# Altium PCB RGBlink.PcbDoc (part 2 of 2)
Units mm, origin at the board's own origin, x right, y up, seen from the top; angles counter-clockwise.
Board outline 49.44 x 43.42 mm, 2 copper layers (Top Layer, Bottom Layer), stack 1.621 mm thick; 48 components, 43 nets, 170 pads, 158 vias.
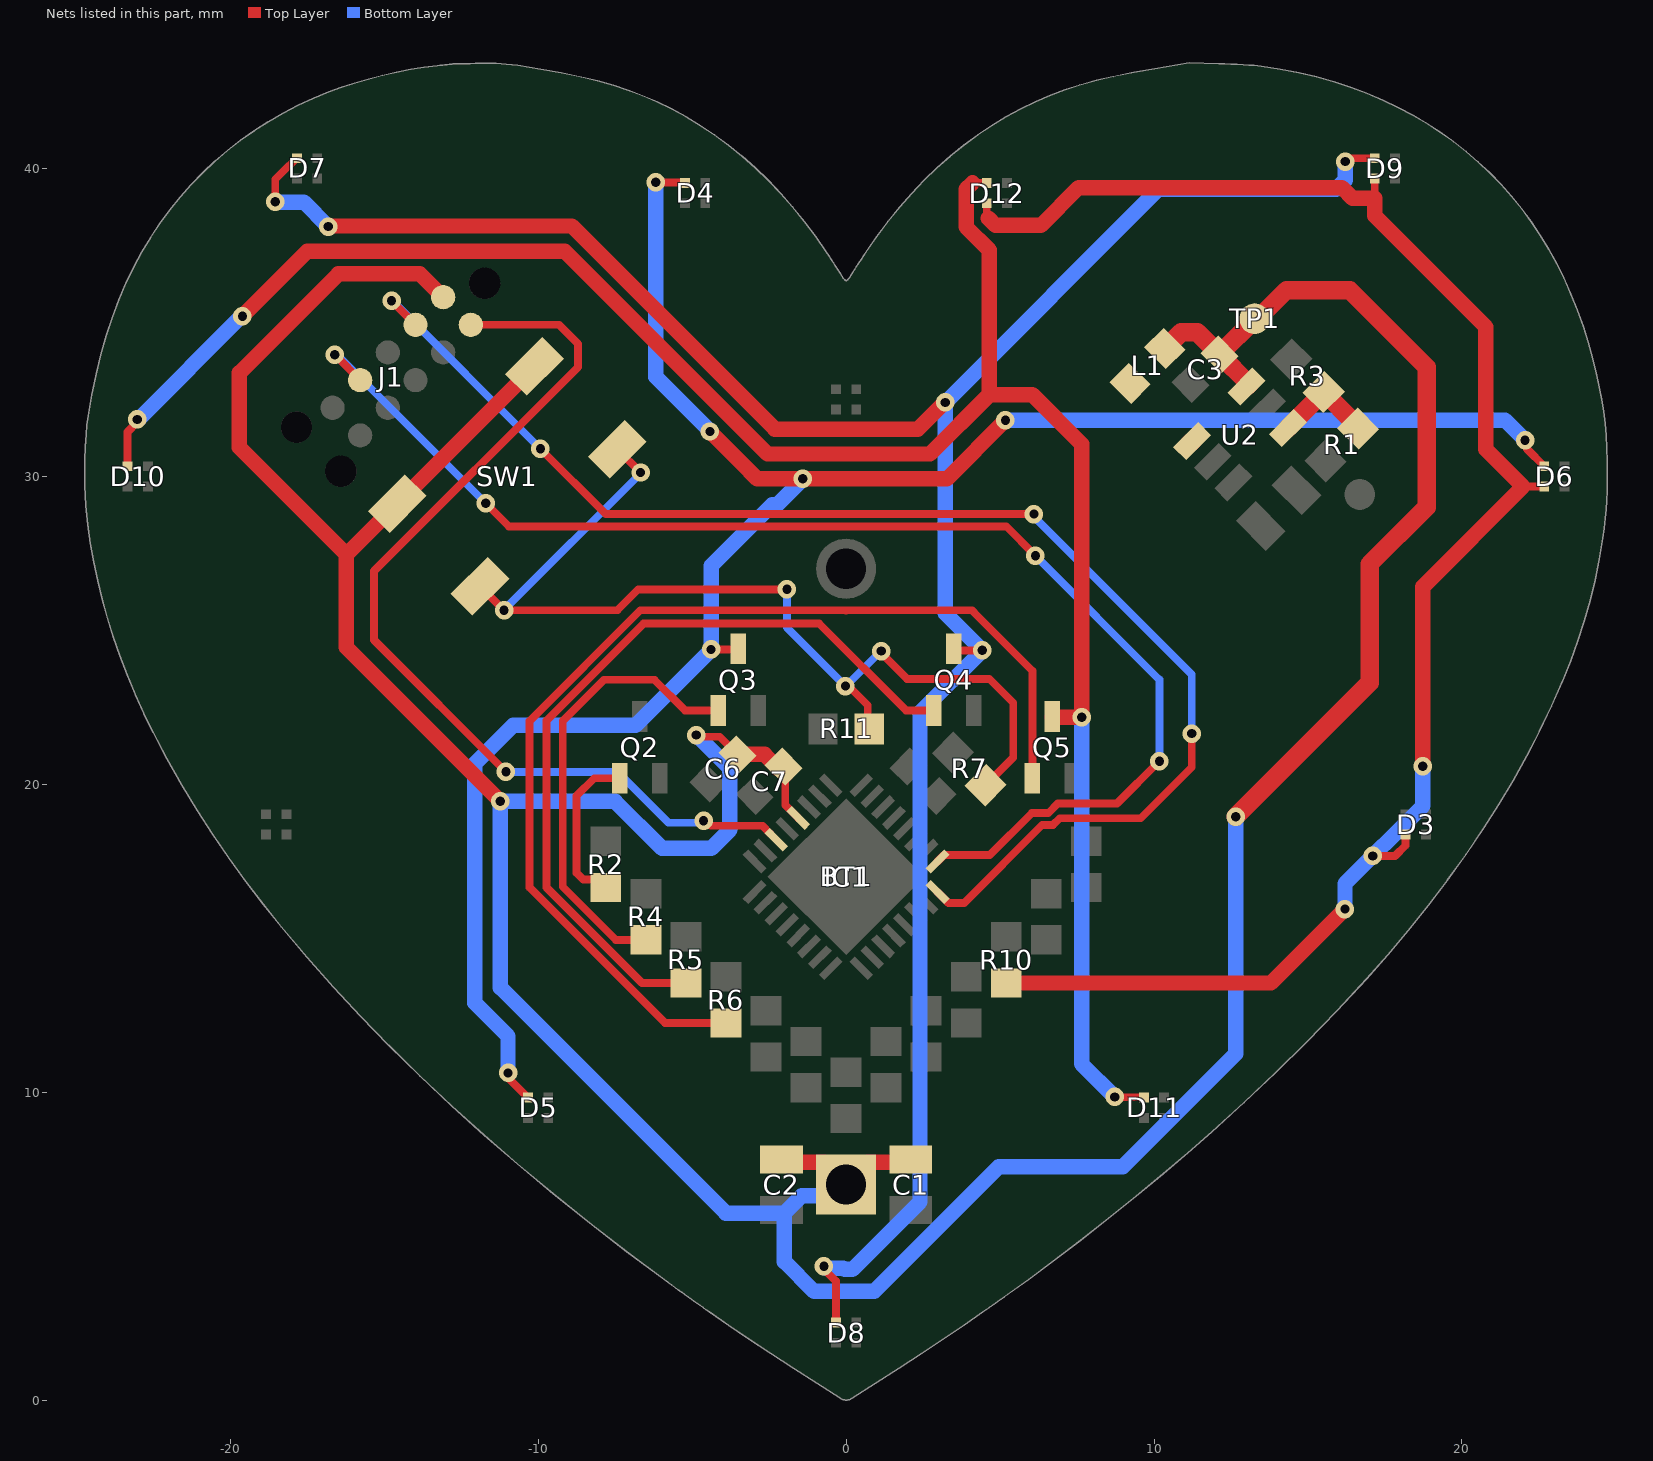
[diagram p2: the nets of this part, all layers, seen from the top]

## Via types
v1: diameter 0.6, hole 0.3, Top Layer to Bottom Layer, tented both sides, 157 vias
v2: diameter 1, hole 0.5, Top Layer to Bottom Layer, tented both sides, 1 vias

## Nets (pads, with @x,y where several pads share a name; then routed paths per layer and width w, separated by ;. In a path a pad name is that pad's centre, name@x,y a point inside that pad or via, vN(x,y) a via of type N, cw(c..) or ccw(c..) an arc to the next point about the centre after c; other vN are vias at no path point) (continued)
NetD3_3: D3.3 D6.3 D9.3 D12.3 R10.2 | length 56.3
  Top Layer w0.254: 4.569,38.381 D12.3@4.569,38.869 ; v1(17.1,17.675) 17.825,17.675 18.169,18.019 D3.3@18.169,18.369 ; 17.169,39.03 D9.3@17.169,39.669 ; 21.819,29.669 21.981,29.669 D6.3@22.669,29.669
  Top Layer w0.5: 4.621,38.381 4.852,38.15 6.325,38.15 7.55,39.375 16.1,39.375 16.445,39.03 17.169,39.03 17.169,38.456 20.775,34.85 20.775,30.875 21.981,29.669 18.727,26.416 v1(18.727,20.589) ; R10.2@5.2,13.55 13.8,13.55 v1(16.2,15.95)
  Bottom Layer w0.5: v1(16.2,15.95) 16.2,16.775 18.727,19.302 v1(18.727,20.589)
NetD4_4: D4.4 D5.4 D6.4 Q3.3 | length 67.5
  Top Layer w0.254: v1(-10.975,10.63) -10.909,10.564 -10.909,10.408 D5.4@-10.331,9.83 ; v1(-6.179,39.547) -6.17,39.538 -5.239,39.538 D4.4@-5.231,39.53 ; v1(-4.381,24.381) -3.519,24.381 Q3.3@-3.5,24.4 ; v1(22.047,31.171) 22.113,31.105 22.113,30.886 D6.4@22.669,30.33
  Top Layer w0.5: v1(-4.419,31.456) -3.416,30.454 -2.883,29.921 3.271,29.921 v1(5.175,31.825)
  Bottom Layer w0.5: v1@-10.975,10.657 -10.975,11.826 -12.05,12.901 -12.05,20.675 -10.812,21.913 -6.837,21.913 -4.381,24.369 v1(-4.381,24.381) ; v1(-6.179,39.547) -6.175,39.543 -6.175,33.225 -4.419,31.469 v1(-4.419,31.456) ; v1@-4.375,24.402 -4.375,27.1 -2.398,29.077 -2.248,29.077 v1(-1.404,29.921) ; v1(5.175,31.825) 21.395,31.825 22.047,31.173 v1(22.047,31.171)
NetD7_4: D7.4 D8.4 D9.4 Q4.3 | length 78.5
  Top Layer w0.254: v1(-18.533,38.92) -18.533,39.646 -18.096,40.083 -18.077,40.083 D7.4@-17.831,40.33 ; v1(-0.719,4.356) -0.719,4.262 -0.331,3.874 D8.4@-0.331,2.53 ; Q4.3@3.5,24.4 3.55,24.35 v1(4.425,24.35) ; v1@16.41,40.33 17.16,40.33 D9.4@17.165,40.325
  Top Layer w0.5: v1(-16.815,38.109) -16.795,38.128 -8.903,38.128 -2.31,31.535 0.001,31.535 0.011,31.525 2.323,31.525 3.198,32.4 v1(3.225,32.4)
  Bottom Layer w0.5: v1(-18.533,38.92) -18.514,38.901 -17.607,38.901 v1(-16.815,38.109) ; v1(-0.719,4.356) -0.653,4.29 -0.085,4.29 -0.047,4.252 0.207,4.252 2.4,6.445 2.4,22.325 v1(4.425,24.35) 3.225,25.55 v1(3.225,32.4) 10.15,39.325 15.915,39.325 16.208,39.618 v1(16.208,40.221)
NetD10_4: D10.4 D11.4 D12.4 Q5.3 | length 70.1
  Top Layer w0.254: D10.4@-23.331,30.33 -23.331,31.438 -23.012,31.756 v1(-23.012,31.85) ; 4.105,39.53 D12.4@4.569,39.53 ; v1(8.725,9.85) 8.735,9.84 9.659,9.84 D11.4@9.669,9.83
  Top Layer w0.5: v1(-19.6,35.2) -17.495,37.305 -9.13,37.305 -2.55,30.725 2.725,30.725 4.65,32.65 ; 4.105,39.53 3.899,39.324 3.899,38.101 4.65,37.35 4.65,32.65 ; Q5.3@6.7,22.2 6.725,22.175 v1(7.65,22.175) 7.65,31.05 6.05,32.65 4.65,32.65
  Bottom Layer w0.254: v1(-23.012,31.85) v1@-22.979,31.85 ; v1@-19.629,35.2 v1(-19.6,35.2)
  Bottom Layer w0.5: v1@-22.979,31.85 v1@-19.629,35.2 ; v1(7.65,22.175) 7.65,10.925 v1(8.725,9.85)
NetL1_2: L1.2 U2.1 | length 0.1
  Top Layer w0.6: U2.1@11.164,31.074 U2.1@11.234,31.145
NetQ2_1: Q2.1 R2.1 | length 5.3
  Top Layer w0.254: R2.1@-7.8,16.65 -8.057,16.907 -8.532,16.907 -8.75,17.125 -8.75,19.625 -8.175,20.2 Q2.1@-7.35,20.2
NetQ3_1: Q3.1 R4.1 | length 14.8
  Top Layer w0.254: R4.1@-6.5,14.95 -7.475,14.95 -9.2,16.675 -9.2,22.055 -7.857,23.398 -6.223,23.398 -5.225,22.4 Q3.1@-4.15,22.4
NetQ4_1: Q4.1 R5.1 | length 26.3
  Top Layer w0.254: R5.1@-5.2,13.55 -6.623,13.55 -9.725,16.652 -9.725,22.069 -6.575,25.219 -0.869,25.219 1.95,22.4 Q4.1@2.85,22.4
NetQ5_1: Q5.1 R6.1 | length 35.7
  Top Layer w0.254: R6.1@-3.9,12.25 -5.873,12.25 -10.275,16.652 -10.275,22.058 -6.683,25.65 -0.127,25.65 ccw(c0,27) 0.127,25.65 4.088,25.65 4.162,25.576 6.05,23.688 Q5.1@6.05,20.2
NetR1_1: R1.1 R3.2 U2.4 | length 3.3
  Top Layer w0.6: U2.4@14.346,31.569 R3.2@15.512,32.735 16.521,31.727 16.521,31.552 R1.1@16.502,31.533
NetR7_1: R7.1 R11.2 SW1.2 | length 33.4
  Top Layer w0.254: SW1.2@-11.884,26.429 v1(-11.105,25.65) -7.425,25.65 -6.744,26.331 v1(-1.921,26.331) ; SW1.2@-7.429,30.884 v1(-6.67,30.125) ; v1(-0.02,23.189) 0.047,23.123 0.15,23.123 0.706,22.566 0.706,21.844 R11.2@0.75,21.8 ; v1(1.143,24.326) 1.143,24.264 1.982,23.425 4.65,23.425 5.431,22.644 5.431,20.87 R7.1@4.53,19.97
  Bottom Layer w0.254: v1(-11.105,25.65) -11.105,25.67 -6.67,30.105 v1(-6.67,30.125) ; v1(-1.921,26.331) -1.921,25.09 v1(-0.02,23.189) -0.007,23.189 1.13,24.326 v1(1.143,24.326)
NRST: IC1.6 J1.10 | length 31.6
  Top Layer w0.254: J1.10@-12.183,34.921 -9.321,34.921 -8.7,34.3 -8.7,33.55 -15.325,26.925 -15.325,24.687 v1(-11.044,20.406) ; v1(-4.625,18.819) -4.55,18.819 -4.385,18.654 -2.714,18.654 IC1.6@-2.473,18.413
  Bottom Layer w0.254: v1(-11.044,20.406) -11.038,20.4 -7.413,20.4 -5.766,18.753 -4.691,18.753 v1(-4.625,18.819)
SWCLK: IC1.25 J1.4 | length 43.5
  Top Layer w0.254: v1@-16.563,33.913 J1.4@-15.775,33.125 ; v1(-11.7,29.125) -10.95,28.375 5.2,28.375 v1(6.15,27.425) ; IC1.25@2.97,17.495 3.179,17.704 4.668,17.704 6.029,19.065 6.563,19.065 6.873,19.375 8.8,19.375 v1(10.175,20.75)
  Bottom Layer w0.254: v1(-16.6,33.95) -16.525,33.95 v1(-11.7,29.125) ; v1(6.15,27.425) 10.175,23.4 v1(10.175,20.75)
SWDIO: IC1.24 J1.2 | length 45.4
  Top Layer w0.254: v1@-14.741,35.684 J1.2@-13.979,34.921 ; v1(-9.925,30.9) -7.8,28.775 v1(6.1,28.775) ; IC1.24@2.97,16.505 3.325,16.15 3.836,16.15 6.37,18.684 6.721,18.684 6.937,18.9 9.569,18.9 11.225,20.556 v1(11.225,21.65)
  Bottom Layer w0.254: v1(-14.758,35.7) -14.725,35.7 v1(-9.925,30.9) ; v1(6.1,28.775) 6.1,28.694 11.225,23.569 v1(11.225,21.65)
VCC: BT1.1 C1.2 C2.2 C3.2 C6.2 C7.2 IC1.4 J1.1 L1.1 SW1.1 TP1.1 U2.6 | length 134.3
  Top Layer w0.254: v1(-4.865,21.598) -4.814,21.547 -4.1,21.547 C6.2@-3.48,20.928 ; C7.2@-1.826,20.474 -1.826,20.289 -1.98,20.135 -1.975,20.129 -1.975,19.329 IC1.4@-1.556,18.909
  Top Layer w0.5: J1.1@-13.081,35.819 -13.837,36.575 -16.487,36.575 -19.7,33.362 -19.7,30.937 -16.225,27.462 ; v1(-11.225,19.45) -16.225,24.45 -16.225,27.462 ; SW1.1@-10.116,33.571 SW1.1@-14.571,29.116 -16.225,27.462 ; C6.2@-3.526,20.974 -3.307,20.974 -3.261,20.928 -3.215,20.974 -2.645,20.974 -2.145,20.474 C7.2@-1.826,20.474 ; C2.2@-2.1,7.82 -2.005,7.725 -0.725,7.725 BT1.1@0,7 0.725,7.725 2.005,7.725 C1.2@2.1,7.82
  Top Layer w0.6: L1.1@10.351,34.15 10.881,34.68 11.404,34.68 C3.2@12.132,33.952 ; v1(12.65,18.95) 17,23.3 17,27.15 18.85,29 18.85,33.55 16.35,36.05 14.305,36.05 13.376,35.121 TP1.1@13.268,35.121 13.268,35.104 12.132,33.969 C3.2@12.132,33.952 ; U2.6@13.002,32.912 13.087,32.997 C3.2@12.132,33.952
  Bottom Layer w0.5: v1(-4.865,21.598) -4.859,21.598 -3.775,20.514 -3.775,18.525 -4.375,17.925 -5.975,17.925 -7.5,19.45 v1(-11.225,19.45) -11.225,13.4 -3.9,6.075 -2,6.075 ; BT1.1@0,7 -0.357,6.643 -1.432,6.643 -1.754,6.321 -2,6.075 ; v1(12.65,18.95) 12.65,11.248 8.98,7.577 4.952,7.577 0.912,3.537 -1.037,3.537 -2,4.5 -2,6.075
pads on no net: J1.7 J1.9 J1.A J1.B J1.C

## Polygon pours and split planes (outlines as drawn)
GND on Top Layer "GND_L01_P003" (solid, pour order 3): -23.58,24.179 cw(c-4.488,31.162) -24.303,26.619 cw(c-7.002,30.585) -24.685,29.048 cw(c-15.985,29.805) -24.717,29.707 cw(c-2.546,29.954) -24.711,30.542 cw(c-2.741,29.96) -24.674,31.363 cw(c-17.951,30.933) -24.608,31.967 cw(c-3.322,28.66) -24.352,33.326 cw(c-8.547,29.82) -24.023,34.571 cw(c-10.135,30.307) -23.615,35.723 cw(c-11.591,30.892) -23.123,36.804 cw(c-12.294,31.252) -21.957,38.648 cw(c-12.782,31.627) -20.495,40.228 cw(c-12.73,31.568) -18.76,41.515 cw(c-12.261,30.794) -16.785,42.486 cw(c-12.595,31.659) -15.967,42.768 cw(c-11.211,27.097) -15.057,43.016 cw(c-11.206,27.077) -14.133,43.211 cw(c-12.045,31.701) -13.275,43.334 ccw(c-19.728,104.362) -13.105,43.353 ccw(c-17.884,87.389) -12.949,43.37 ccw(c-18.49,92.779) -12.818,43.385 ccw(c-13.001,44.973) -12.768,43.391 cw(c-12.701,42.94) -12.712,43.396 cw(c-11.286,-19.446) -12.476,43.401 cw(c-11.761,5.768) -12.197,43.405 cw(c-11.479,-18.261) -11.882,43.408 cw(c-11.722,19.11) -11.358,43.406 cw(c-11.419,39.341) -11.029,43.388 cw(c-11.604,37.415) -10.663,43.341 cw(c-24.347,-42.839) -9.913,43.218 cw(c-14.929,13.311) -8.593,42.967 cw(c-11.276,30.41) -7.546,42.697 cw(c-10.547,32.809) -6.618,42.366 cw(c-11.546,30.38) -5.67,41.931 cw(c-10.834,31.78) -4.266,41.084 cw(c-11.749,30.483) -2.949,40.019 cw(c-12.425,29.751) -1.735,38.749 cw(c-14.135,28.311) -0.642,37.29 cw(c-33.705,15.286) -0.481,37.047 cw(c-27.486,19.359) -0.33,36.815 cw(c-26.289,20.128) -0.205,36.618 cw(c-2.006,35.479) -0.147,36.52 ccw(c0.506,36.886) -0.107,36.457 ccw(c0.326,36.76) -0.064,36.404 ccw(c0.237,36.679) -0.024,36.365 ccw(c0.005,36.399) 0.005,36.355 ccw(c0.005,36.399) 0.033,36.365 ccw(c-0.228,36.679) 0.073,36.404 ccw(c-0.317,36.76) 0.116,36.457 ccw(c-0.497,36.886) 0.156,36.52 cw(c2.015,35.479) 0.214,36.618 cw(c26.453,20.029) 0.339,36.815 cw(c27.436,19.397) 0.49,37.047 cw(c33.868,15.185) 0.651,37.29 cw(c14.145,28.31) 1.744,38.749 cw(c12.434,29.75) 2.958,40.019 cw(c11.759,30.483) 4.275,41.084 cw(c10.843,31.78) 5.679,41.931 cw(c11.461,30.565) 6.642,42.371 cw(c10.64,32.576) 7.594,42.708 cw(c11.413,30.007) 8.672,42.983 cw(c15.097,12.568) 10.028,43.238 11.139,43.422 12.095,43.401 cw(c11.621,22.214) 12.492,43.388 cw(c11.571,20.978) 12.896,43.368 cw(c11.722,23.528) 13.251,43.344 cw(c12.974,39.742) 13.479,43.319 cw(c10.947,25.4) 14.708,43.102 cw(c11.822,29.514) 15.839,42.811 cw(c12.084,30.383) 16.907,42.437 cw(c11.965,30.084) 17.945,41.97 cw(c12.621,31.387) 20.131,40.548 cw(c12.865,31.686) 21.933,38.694 cw(c12.407,31.332) 23.311,36.435 cw(c10.111,30.257) 24.243,33.819 cw(c0.736,27.894) 24.458,32.89 cw(c12.387,30.347) 24.598,32.097 cw(c13.623,30.524) 24.681,31.332 cw(c8.834,30.174) 24.72,30.491 cw(c2.25,30.042) 24.723,29.803 cw(c12.812,29.93) 24.703,29.217 cw(c13.266,29.902) 24.654,28.642 cw(c5.427,30.77) 24.57,27.989 cw(c6.112,30.67) 23.274,23.365 cw(c-4.518,35.195) 20.708,18.583 cw(c-12.53,40.47) 16.905,13.686 cw(c-32.546,58.684) 11.88,8.718 cw(c-31.81,57.857) 10.301,7.358 cw(c-52.918,83.168) 8.512,5.902 cw(c-51.36,81.208) 6.72,4.511 cw(c-25.973,47.683) 5.133,3.354 ccw(c49.166,-59.399) 5.027,3.279 ccw(c307.591,-426.359) 4.852,3.156 ccw(c370.734,-515.926) 4.651,3.014 ccw(c340.479,-473.032) 4.451,2.873 cw(c-29.203,50.535) 3.201,2.014 cw(c-57.891,93.492) 1.714,1.039 cw(c-283.016,442.685) 0.192,0.061 cw(c0.005,0.354) 0.005,0.006 cw(c0.005,0.354) -0.183,0.061 cw(c283.049,442.727) -1.705,1.039 cw(c57.909,93.505) -3.192,2.014 cw(c29.225,50.554) -4.441,2.873 ccw(c-343.689,-477.593) -4.642,3.014 ccw(c-364.801,-507.525) -4.843,3.156 ccw(c-298.414,-413.351) -5.018,3.279 ccw(c-48.765,-58.842) -5.124,3.354 cw(c0.928,11.978) -5.234,3.432 cw(c54.083,85.701) -5.434,3.576 cw(c58.928,92.384) -5.666,3.745 cw(c66.367,102.594) -5.904,3.919 cw(c45.313,73.849) -10.673,7.675 cw(c32.231,58.386) -14.847,11.525 cw(c24.865,51.054) -18.343,15.38 cw(c9.281,38.187) -21.065,19.15 cw(c5.79,35.997) -22.504,21.699 cw(c-1.921,32.1)
NetL1_2 on Top Layer "NETL1_2_L01_P002" (solid, pour order 2): 11.942,31.357 11.022,30.437 8.406,33.054 9.325,33.973
no net on Top Overlay "NONET_L-01_P-001" (none): -23.591,24.195 cw(c-4.498,31.178) -24.313,26.635 cw(c-7.013,30.601) -24.696,29.065 cw(c-15.996,29.821) -24.728,29.723 cw(c-2.556,29.971) -24.721,30.558 cw(c-2.752,29.976) -24.684,31.379 cw(c-17.962,30.949) -24.618,31.983 cw(c-3.332,28.676) -24.362,33.342 cw(c-8.557,29.836) -24.033,34.587 cw(c-10.145,30.323) -23.626,35.739 cw(c-11.601,30.908) -23.133,36.82 cw(c-12.304,31.269) -21.968,38.664 cw(c-12.793,31.643) -20.506,40.245 cw(c-12.741,31.584) -18.771,41.531 cw(c-12.271,30.81) -16.795,42.503 cw(c-12.606,31.675) -15.977,42.784 cw(c-11.221,27.113) -15.067,43.032 cw(c-11.217,27.093) -14.144,43.227 cw(c-12.055,31.717) -13.285,43.351 ccw(c-19.88,105.703) -13.115,43.369 ccw(c-17.895,87.405) -12.96,43.386 ccw(c-18.501,92.795) -12.829,43.401 ccw(c-13.011,44.99) -12.778,43.407 cw(c-12.712,42.956) -12.722,43.412 cw(c-11.281,-20.161) -12.486,43.417 cw(c-11.771,5.784) -12.208,43.421 cw(c-11.486,-18.638) -11.893,43.424 cw(c-11.733,19.126) -11.368,43.422 cw(c-11.429,39.357) -11.04,43.404 cw(c-11.614,37.432) -10.674,43.357 cw(c-24.379,-42.954) -9.923,43.235 cw(c-14.939,13.327) -8.604,42.983 cw(c-11.286,30.426) -7.557,42.713 cw(c-10.558,32.825) -6.629,42.382 cw(c-11.556,30.397) -5.68,41.947 cw(c-10.844,31.796) -4.277,41.1 cw(c-11.76,30.499) -2.959,40.035 cw(c-12.435,29.767) -1.746,38.765 cw(c-14.146,28.327) -0.652,37.307 cw(c-33.716,15.302) -0.491,37.063 cw(c-27.496,19.375) -0.341,36.831 cw(c-26.299,20.144) -0.215,36.634 cw(c-2.016,35.495) -0.157,36.537 ccw(c0.495,36.902) -0.117,36.473 ccw(c0.316,36.776) -0.075,36.42 ccw(c0.227,36.695) -0.034,36.381 ccw(c-0.006,36.416) -0.006,36.371 ccw(c-0.006,36.416) 0.022,36.381 ccw(c-0.239,36.695) 0.063,36.42 ccw(c-0.327,36.776) 0.105,36.473 ccw(c-0.507,36.902) 0.145,36.537 cw(c2.004,35.495) 0.203,36.634 cw(c26.443,20.045) 0.329,36.831 cw(c27.426,19.413) 0.479,37.063 cw(c33.858,15.201) 0.64,37.307 cw(c14.134,28.327) 1.734,38.765 cw(c12.424,29.766) 2.947,40.035 cw(c11.748,30.499) 4.265,41.1 cw(c10.832,31.796) 5.669,41.947 cw(c11.45,30.581) 6.631,42.387 cw(c10.63,32.592) 7.583,42.724 cw(c11.402,30.023) 8.661,42.999 cw(c15.086,12.585) 10.017,43.254 11.129,43.438 12.084,43.417 cw(c11.611,22.23) 12.482,43.404 cw(c11.56,20.994) 12.885,43.384 cw(c11.711,23.544) 13.241,43.36 cw(c12.963,39.758) 13.469,43.335 cw(c10.937,25.416) 14.697,43.118 cw(c11.811,29.53) 15.829,42.827 cw(c12.074,30.399) 16.896,42.453 cw(c11.954,30.1) 17.934,41.986 cw(c12.61,31.403) 20.12,40.564 cw(c12.855,31.702) 21.923,38.71 cw(c12.397,31.348) 23.301,36.451 cw(c10.101,30.273) 24.233,33.836 cw(c0.725,27.91) 24.448,32.906 cw(c12.376,30.363) 24.588,32.113 cw(c13.612,30.54) 24.671,31.348 cw(c8.824,30.19) 24.71,30.508 cw(c2.239,30.058) 24.713,29.819 cw(c12.801,29.946) 24.692,29.233 cw(c13.256,29.918) 24.643,28.658 cw(c5.417,30.786) 24.56,28.005 cw(c6.101,30.686) 23.263,23.381 cw(c-4.529,35.211) 20.698,18.599 cw(c-12.54,40.486) 16.895,13.702 cw(c-32.556,58.7) 11.87,8.734 cw(c-31.821,57.873) 10.291,7.374 cw(c-52.929,83.184) 8.502,5.918 cw(c-51.37,81.224) 6.709,4.527 cw(c-25.983,47.699) 5.123,3.37 ccw(c49.156,-59.383) 5.017,3.295 ccw(c307.581,-426.343) 4.842,3.172 ccw(c370.723,-515.909) 4.641,3.031 ccw(c340.469,-473.016) 4.44,2.889 cw(c-29.213,50.551) 3.19,2.03 cw(c-57.901,93.508) 1.703,1.055 cw(c-283.026,442.702) 0.181,0.077 cw(c-0.006,0.37) -0.006,0.023 cw(c-0.006,0.37) -0.193,0.077 cw(c283.039,442.743) -1.715,1.055 cw(c57.898,93.521) -3.202,2.03 cw(c29.215,50.57) -4.452,2.889 ccw(c-343.7,-477.577) -4.653,3.031 ccw(c-364.812,-507.509) -4.854,3.172 ccw(c-298.424,-413.335) -5.029,3.295 ccw(c-48.776,-58.825) -5.134,3.37 cw(c0.917,11.994) -5.245,3.448 cw(c54.072,85.718) -5.444,3.592 cw(c58.917,92.4) -5.676,3.761 cw(c66.356,102.61) -5.914,3.935 cw(c45.303,73.866) -10.683,7.691 cw(c32.22,58.402) -14.858,11.541 cw(c24.855,51.071) -18.354,15.396 cw(c9.271,38.204) -21.075,19.166 cw(c5.779,36.013) -22.515,21.715 cw(c-1.932,32.117)
no net on Bottom Overlay "NONET_L-01_P-001" (none): -23.583,24.194 cw(c-4.491,31.177) -24.306,26.634 cw(c-7.005,30.601) -24.688,29.064 cw(c-15.988,29.82) -24.72,29.723 cw(c-2.549,29.97) -24.714,30.558 cw(c-2.744,29.975) -24.677,31.378 cw(c-17.954,30.948) -24.611,31.982 cw(c-3.324,28.676) -24.354,33.342 cw(c-8.55,29.835) -24.026,34.586 cw(c-10.138,30.323) -23.618,35.739 cw(c-11.594,30.907) -23.126,36.819 cw(c-12.297,31.268) -21.96,38.663 cw(c-12.785,31.642) -20.498,40.244 cw(c-12.733,31.584) -18.763,41.53 cw(c-12.264,30.809) -16.788,42.502 cw(c-12.598,31.674) -15.97,42.784 cw(c-11.214,27.112) -15.06,43.032 cw(c-11.209,27.093) -14.136,43.227 cw(c-12.048,31.717) -13.278,43.35 ccw(c-19.873,105.703) -13.108,43.368 ccw(c-17.887,87.404) -12.952,43.385 ccw(c-18.493,92.794) -12.821,43.4 ccw(c-13.004,44.989) -12.771,43.407 cw(c-12.704,42.955) -12.715,43.411 cw(c-11.274,-20.162) -12.479,43.416 cw(c-11.764,5.783) -12.2,43.421 cw(c-11.478,-18.639) -11.885,43.423 cw(c-11.725,19.126) -11.361,43.421 cw(c-11.422,39.356) -11.032,43.403 cw(c-11.607,37.431) -10.666,43.356 cw(c-24.371,-42.955) -9.916,43.234 cw(c-14.932,13.326) -8.596,42.982 cw(c-11.278,30.425) -7.549,42.712 cw(c-10.55,32.824) -6.621,42.381 cw(c-11.549,30.396) -5.673,41.946 cw(c-10.837,31.796) -4.269,41.1 cw(c-11.752,30.499) -2.952,40.035 cw(c-12.428,29.766) -1.738,38.764 cw(c-14.138,28.326) -0.644,37.306 cw(c-33.708,15.301) -0.484,37.062 cw(c-27.489,19.374) -0.333,36.83 cw(c-26.292,20.143) -0.208,36.633 cw(c-2.009,35.495) -0.15,36.536 ccw(c0.503,36.901) -0.11,36.472 ccw(c0.323,36.776) -0.067,36.419 ccw(c0.234,36.694) -0.027,36.381 ccw(c0.002,36.415) 0.002,36.37 ccw(c0.002,36.415) 0.03,36.381 ccw(c-0.231,36.694) 0.07,36.419 ccw(c-0.32,36.775) 0.113,36.472 ccw(c-0.5,36.901) 0.153,36.536 cw(c2.012,35.495) 0.211,36.633 cw(c26.45,20.044) 0.336,36.83 cw(c27.433,19.412) 0.487,37.062 cw(c33.865,15.2) 0.648,37.306 cw(c14.142,28.326) 1.742,38.764 cw(c12.432,29.766) 2.955,40.035 cw(c11.756,30.498) 4.272,41.1 cw(c10.84,31.795) 5.676,41.946 cw(c11.458,30.581) 6.639,42.387 cw(c10.637,32.591) 7.591,42.723 cw(c11.41,30.022) 8.669,42.999 cw(c15.094,12.584) 10.025,43.254 11.136,43.437 12.092,43.416 cw(c11.619,22.23) 12.489,43.403 cw(c11.568,20.993) 12.893,43.383 cw(c11.719,23.543) 13.248,43.359 cw(c12.971,39.758) 13.476,43.334 cw(c10.944,25.415) 14.705,43.117 cw(c11.819,29.53) 15.836,42.827 cw(c12.081,30.398) 16.904,42.453 cw(c11.962,30.099) 17.942,41.985 cw(c12.618,31.403) 20.128,40.564 cw(c12.862,31.701) 21.93,38.709 cw(c12.404,31.347) 23.308,36.45 cw(c10.108,30.272) 24.24,33.835 cw(c0.733,27.909) 24.455,32.905 cw(c12.384,30.362) 24.595,32.112 cw(c13.62,30.539) 24.678,31.348 cw(c8.831,30.189) 24.717,30.507 cw(c2.247,30.057) 24.72,29.819 cw(c12.809,29.945) 24.7,29.232 cw(c13.263,29.918) 24.651,28.657 cw(c5.424,30.785) 24.567,28.004 cw(c6.109,30.686) 23.271,23.381 cw(c-4.521,35.21) 20.705,18.598 cw(c-12.533,40.486) 16.903,13.701 cw(c-32.549,58.699) 11.877,8.733 cw(c-31.813,57.872) 10.298,7.374 cw(c-52.921,83.184) 8.509,5.917 cw(c-51.363,81.223) 6.717,4.526 cw(c-25.976,47.698) 5.13,3.369 ccw(c49.164,-59.384) 5.024,3.295 ccw(c307.588,-426.344) 4.849,3.171 ccw(c370.731,-515.91) 4.649,3.03 ccw(c340.477,-473.017) 4.448,2.888 cw(c-29.206,50.55) 3.198,2.03 cw(c-57.894,93.507) 1.711,1.054 cw(c-283.018,442.701) 0.189,0.077 cw(c0.002,0.37) 0.002,0.022 cw(c0.002,0.37) -0.186,0.077 cw(c283.046,442.742) -1.708,1.054 cw(c57.906,93.52) -3.195,2.03 cw(c29.222,50.569) -4.444,2.888 ccw(c-343.692,-477.577) -4.645,3.03 ccw(c-364.804,-507.51) -4.846,3.171 ccw(c-298.417,-413.336) -5.021,3.295 ccw(c-48.768,-58.826) -5.127,3.369 cw(c0.925,11.993) -5.237,3.448 cw(c54.08,85.717) -5.436,3.592 cw(c58.925,92.399) -5.669,3.76 cw(c66.364,102.609) -5.907,3.934 cw(c45.31,73.865) -10.676,7.691 cw(c32.228,58.401) -14.85,11.54 cw(c24.862,51.07) -18.346,15.395 cw(c9.278,38.203) -21.068,19.165 cw(c5.787,36.012) -22.507,21.715 cw(c-1.924,32.116)
GND on Bottom Layer "GND_L02_P004" (solid, pour order 4): -23.589,24.173 cw(c-4.496,31.155) -24.311,26.613 cw(c-7.011,30.579) -24.694,29.042 cw(c-15.994,29.798) -24.726,29.701 cw(c-2.554,29.948) -24.719,30.536 cw(c-2.75,29.953) -24.682,31.357 cw(c-17.96,30.927) -24.616,31.961 cw(c-3.33,28.654) -24.36,33.32 cw(c-8.555,29.813) -24.031,34.565 cw(c-10.143,30.301) -23.624,35.717 cw(c-11.599,30.886) -23.131,36.797 cw(c-12.302,31.246) -21.966,38.642 cw(c-12.791,31.62) -20.504,40.222 cw(c-12.739,31.562) -18.769,41.509 cw(c-12.269,30.787) -16.793,42.48 cw(c-12.604,31.652) -15.975,42.762 cw(c-11.219,27.09) -15.065,43.01 cw(c-11.215,27.071) -14.142,43.205 cw(c-12.053,31.695) -13.283,43.328 ccw(c-19.736,104.356) -13.113,43.346 ccw(c-17.893,87.383) -12.958,43.364 ccw(c-18.499,92.772) -12.827,43.378 ccw(c-13.009,44.967) -12.776,43.385 cw(c-12.71,42.933) -12.72,43.39 cw(c-11.295,-19.452) -12.484,43.395 cw(c-11.769,5.761) -12.206,43.399 cw(c-11.487,-18.268) -11.891,43.402 cw(c-11.731,19.104) -11.366,43.4 cw(c-11.427,39.335) -11.038,43.381 cw(c-11.612,37.409) -10.672,43.335 cw(c-24.355,-42.845) -9.921,43.212 cw(c-14.937,13.304) -8.602,42.961 cw(c-11.284,30.404) -7.555,42.691 cw(c-10.556,32.803) -6.627,42.36 cw(c-11.554,30.374) -5.678,41.924 cw(c-10.842,31.774) -4.275,41.078 cw(c-11.758,30.477) -2.957,40.013 cw(c-12.433,29.745) -1.744,38.743 cw(c-14.144,28.305) -0.65,37.284 cw(c-33.714,15.28) -0.489,37.04 cw(c-27.494,19.353) -0.339,36.809 cw(c-26.297,20.121) -0.213,36.612 cw(c-2.014,35.473) -0.155,36.514 ccw(c0.497,36.879) -0.115,36.451 ccw(c0.318,36.754) -0.073,36.397 ccw(c0.229,36.673) -0.032,36.359 ccw(c-0.004,36.393) -0.004,36.349 ccw(c-0.004,36.393) 0.024,36.359 ccw(c-0.237,36.673) 0.065,36.397 ccw(c-0.325,36.754) 0.107,36.451 ccw(c-0.505,36.88) 0.147,36.514 cw(c2.006,35.473) 0.205,36.612 cw(c26.445,20.022) 0.331,36.809 cw(c27.428,19.391) 0.481,37.04 cw(c33.86,15.178) 0.642,37.284 cw(c14.136,28.304) 1.736,38.743 cw(c12.426,29.744) 2.949,40.013 cw(c11.75,30.476) 4.267,41.078 cw(c10.834,31.774) 5.671,41.924 cw(c11.452,30.559) 6.633,42.365 cw(c10.632,32.569) 7.585,42.701 cw(c11.404,30.001) 8.663,42.977 cw(c15.088,12.562) 10.019,43.232 11.131,43.416 12.086,43.394 cw(c11.613,22.208) 12.484,43.382 cw(c11.562,20.972) 12.887,43.362 cw(c11.713,23.521) 13.243,43.337 cw(c12.965,39.736) 13.471,43.312 cw(c10.939,25.393) 14.7,43.095 cw(c11.813,29.508) 15.831,42.805 cw(c12.076,30.377) 16.898,42.431 cw(c11.956,30.077) 17.936,41.963 cw(c12.612,31.381) 20.122,40.542 cw(c12.857,31.679) 21.925,38.687 cw(c12.399,31.325) 23.303,36.429 cw(c10.103,30.251) 24.235,33.813 cw(c0.727,27.887) 24.45,32.883 cw(c12.378,30.341) 24.59,32.091 cw(c13.614,30.518) 24.673,31.326 cw(c8.826,30.167) 24.712,30.485 cw(c2.241,30.035) 24.715,29.797 cw(c12.803,29.923) 24.694,29.211 cw(c13.258,29.896) 24.645,28.636 cw(c5.419,30.763) 24.562,27.983 cw(c6.103,30.664) 23.265,23.359 cw(c-4.527,35.188) 20.7,18.576 cw(c-12.538,40.464) 16.897,13.679 cw(c-32.554,58.678) 11.872,8.712 cw(c-31.819,57.85) 10.293,7.352 cw(c-52.927,83.162) 8.504,5.895 cw(c-51.368,81.202) 6.711,4.504 cw(c-25.981,47.677) 5.125,3.347 ccw(c49.158,-59.405) 5.019,3.273 ccw(c307.583,-426.366) 4.844,3.15 ccw(c370.725,-515.932) 4.643,3.008 ccw(c340.471,-473.039) 4.442,2.866 cw(c-29.211,50.529) 3.192,2.008 cw(c-57.899,93.486) 1.705,1.032 cw(c-283.024,442.679) 0.183,0.055 cw(c-0.004,0.348) -0.004,0 cw(c-0.004,0.348) -0.191,0.055 cw(c283.041,442.72) -1.713,1.032 cw(c57.9,93.498) -3.2,2.008 cw(c29.217,50.548) -4.45,2.866 ccw(c-343.698,-477.599) -4.651,3.008 ccw(c-364.81,-507.532) -4.852,3.15 ccw(c-298.422,-413.358) -5.027,3.273 ccw(c-48.774,-58.848) -5.132,3.347 cw(c0.919,11.971) -5.243,3.426 cw(c54.074,85.695) -5.442,3.57 cw(c58.919,92.378) -5.674,3.739 cw(c66.358,102.587) -5.912,3.913 cw(c45.305,73.843) -10.681,7.669 cw(c32.222,58.379) -14.856,11.519 cw(c24.857,51.048) -18.352,15.373 cw(c9.273,38.181) -21.073,19.144 cw(c5.781,35.991) -22.513,21.693 cw(c-1.93,32.094)

## Keep-outs
Keep-Out Layer:
  the board outline again, w2

## Silkscreen, mask and mechanical layers (free items; w line width, h text height)
Bottom Overlay:
  drawing of 118 lines, arcs and shapes, not listed
  text "Made by" at 20.204,28.184 h2 r315
  text "sdani" at 17.187,25.309 h2 r315
Mechanical 1:
  circle w0.1: c0,34.825 r1
  lines w0.013: -24.717,29.707 ccw(c-15.985,29.805) -24.685,29.048 ccw(c-7.002,30.585) -24.303,26.619 ccw(c-4.488,31.162) -23.58,24.179 ccw(c-1.921,32.1) -22.504,21.699 ccw(c5.789,35.997) -21.065,19.15 ccw(c9.281,38.188) -18.343,15.38 ccw(c24.865,51.054) -14.847,11.525 ccw(c32.23,58.386) -10.673,7.675 ccw(c45.314,73.85) -5.904,3.919 ccw(c66.623,102.945) -5.666,3.745 ccw(c59.046,92.546) -5.434,3.576 ccw(c53.507,84.907) -5.234,3.432 ccw(c0.942,11.998) -5.124,3.354 cw(c-49.191,-59.448) -5.018,3.279 cw(c-307.078,-425.65) -4.843,3.156 cw(c-341.595,-474.616) -4.642,3.014 cw(c-345.451,-480.09) -4.441,2.873 ccw(c29.213,50.536) -3.192,2.014 ccw(c57.883,93.467) -1.705,1.039 ccw(c282.849,442.414) -0.183,0.061 ccw(c0.005,0.354) 0.005,0.006 ccw(c0.005,0.354) 0.192,0.061 ccw(c-282.84,442.414) 1.714,1.039 ccw(c-57.874,93.467) 3.201,2.014 ccw(c-29.204,50.536) 4.451,2.873 cw(c345.461,-480.084) 4.651,3.014 cw(c341.604,-474.622) 4.852,3.156 cw(c307.088,-425.644) 5.027,3.279 cw(c49.201,-59.448) 5.133,3.354 ccw(c-25.974,47.685) 6.72,4.511 ccw(c-51.36,81.208) 8.512,5.902 ccw(c-52.917,83.166) 10.301,7.358 ccw(c-31.813,57.86) 11.88,8.718 ccw(c-32.546,58.684) 16.905,13.686 ccw(c-12.53,40.471) 20.708,18.583 ccw(c-4.518,35.195) 23.274,23.365 ccw(c6.112,30.67) 24.57,27.989 ccw(c5.422,30.77) 24.654,28.642 ccw(c13.263,29.903) 24.703,29.217 ccw(c12.812,29.93) 24.723,29.803 ccw(c2.241,30.042) 24.72,30.491 ccw(c8.831,30.174) 24.681,31.332 ccw(c13.62,30.524) 24.598,32.097 ccw(c12.383,30.346) 24.458,32.89 ccw(c0.727,27.892) 24.243,33.819 ccw(c10.111,30.257) 23.311,36.435 ccw(c12.407,31.332) 21.933,38.694 ccw(c12.865,31.686) 20.131,40.548 ccw(c12.621,31.387) 17.945,41.97 ccw(c11.964,30.082) 16.907,42.437 ccw(c12.084,30.381) 15.839,42.811 ccw(c11.821,29.512) 14.708,43.102 ccw(c10.947,25.398) 13.479,43.319 ccw(c12.973,39.738) 13.251,43.344 ccw(c11.719,23.495) 12.896,43.368 ccw(c11.571,20.98) 12.492,43.388 ccw(c11.622,22.223) 12.095,43.401 11.139,43.422 10.028,43.238 ccw(c15.097,12.565) 8.672,42.983 ccw(c11.413,30.007) 7.594,42.708 ccw(c10.641,32.575) 6.642,42.371 ccw(c11.462,30.564) 5.679,41.931 ccw(c10.843,31.78) 4.275,41.084 ccw(c11.759,30.483) 2.958,40.019 ccw(c12.434,29.75) 1.745,38.749 ccw(c14.145,28.31) 0.651,37.29 ccw(c33.973,15.116) 0.49,37.047 ccw(c27.474,19.372) 0.339,36.815 ccw(c26.469,20.018) 0.214,36.618 ccw(c2.014,35.48) 0.156,36.52 cw(c-0.497,36.886) 0.116,36.457 cw(c-0.317,36.76) 0.073,36.404 cw(c-0.228,36.679) 0.033,36.365 cw(c0.005,36.399) 0.005,36.355 cw(c0.005,36.399) -0.024,36.365 cw(c0.237,36.679) -0.064,36.404 cw(c0.326,36.76) -0.107,36.457 cw(c0.506,36.886) -0.147,36.52 ccw(c-2.005,35.48) -0.205,36.618 ccw(c-26.46,20.018) -0.33,36.815 ccw(c-27.465,19.372) -0.481,37.047 ccw(c-33.963,15.116) -0.642,37.29 ccw(c-14.136,28.31) -1.735,38.749 ccw(c-12.425,29.75) -2.949,40.019 ccw(c-11.749,30.483) -4.266,41.084 ccw(c-10.834,31.78) -5.67,41.931 ccw(c-11.545,30.381) -6.618,42.366 ccw(c-10.548,32.807) -7.546,42.697 ccw(c-11.276,30.408) -8.593,42.967 ccw(c-14.93,13.302) -9.913,43.218 ccw(c-24.369,-42.979) -10.663,43.341 ccw(c-11.604,37.413) -11.029,43.388 ccw(c-11.419,39.34) -11.358,43.406 ccw(c-11.722,19.087) -11.882,43.408 ccw(c-11.473,-18.911) -12.197,43.405 ccw(c-11.756,5.464) -12.476,43.401 ccw(c-11.262,-20.614) -12.712,43.396 ccw(c-12.701,42.939) -12.768,43.391 cw(c-13.001,44.972) -12.818,43.385 cw(c-18.424,92.195) -12.949,43.37 cw(c-17.858,87.153) -13.105,43.353 cw(c-19.809,105.115) -13.275,43.334 ccw(c-12.045,31.699) -14.133,43.211 ccw(c-11.206,27.078) -15.057,43.016 ccw(c-11.211,27.097) -15.967,42.768 ccw(c-12.595,31.657) -16.785,42.486 ccw(c-12.261,30.794) -18.76,41.515 ccw(c-12.73,31.568) -20.495,40.228 ccw(c-12.782,31.626) -21.957,38.648 ccw(c-12.294,31.253) -23.123,36.804 ccw(c-11.59,30.892) -23.615,35.723 ccw(c-10.135,30.307) -24.023,34.571 ccw(c-8.548,29.82) -24.352,33.326 ccw(c-3.319,28.66) -24.608,31.967 ccw(c-17.952,30.933) -24.674,31.363 ccw(c-2.742,29.96) -24.711,30.542 ccw(c-2.545,29.954) -24.717,29.707
  lines w0.254: -24.725,50 -24.725,0 25.313,0 25.313,50.038 -24.687,50.038